# Altium PCB Buck_PCB.PcbDoc
Units mm, origin at the board's own origin, x right, y up, seen from the top; angles counter-clockwise.
Board outline 107.95 x 50.8 mm, 4 copper layers (Top Layer, MidLayer1, MidLayer2, Bottom Layer); 25 components, 16 nets, 65 pads, 71 vias.
Unrouted connection lines stored in the file: 3.
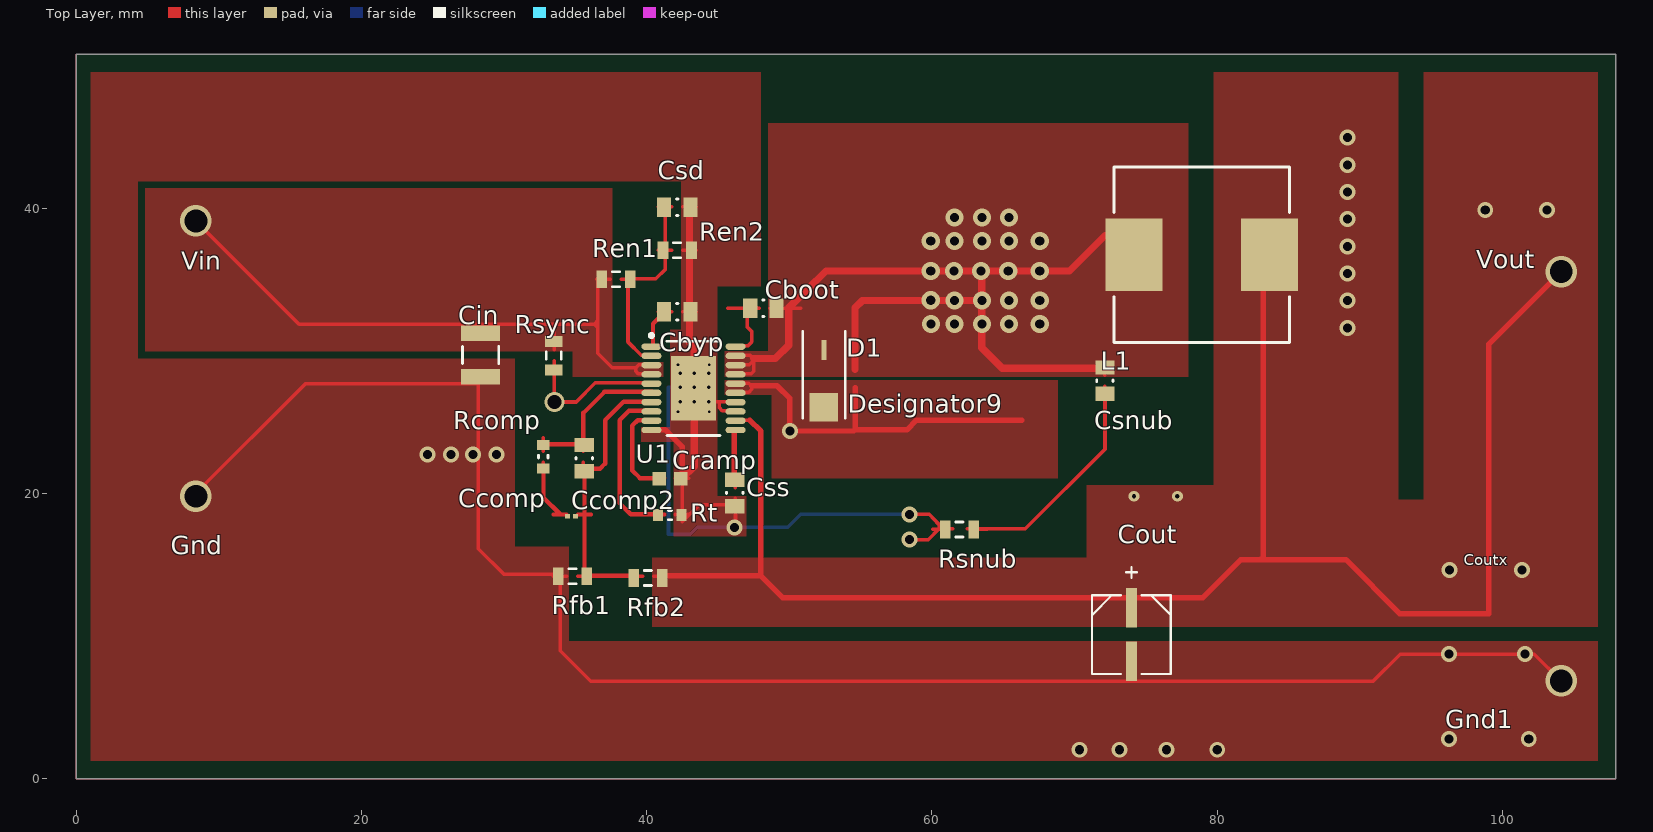
[diagram p0: Top Layer view]
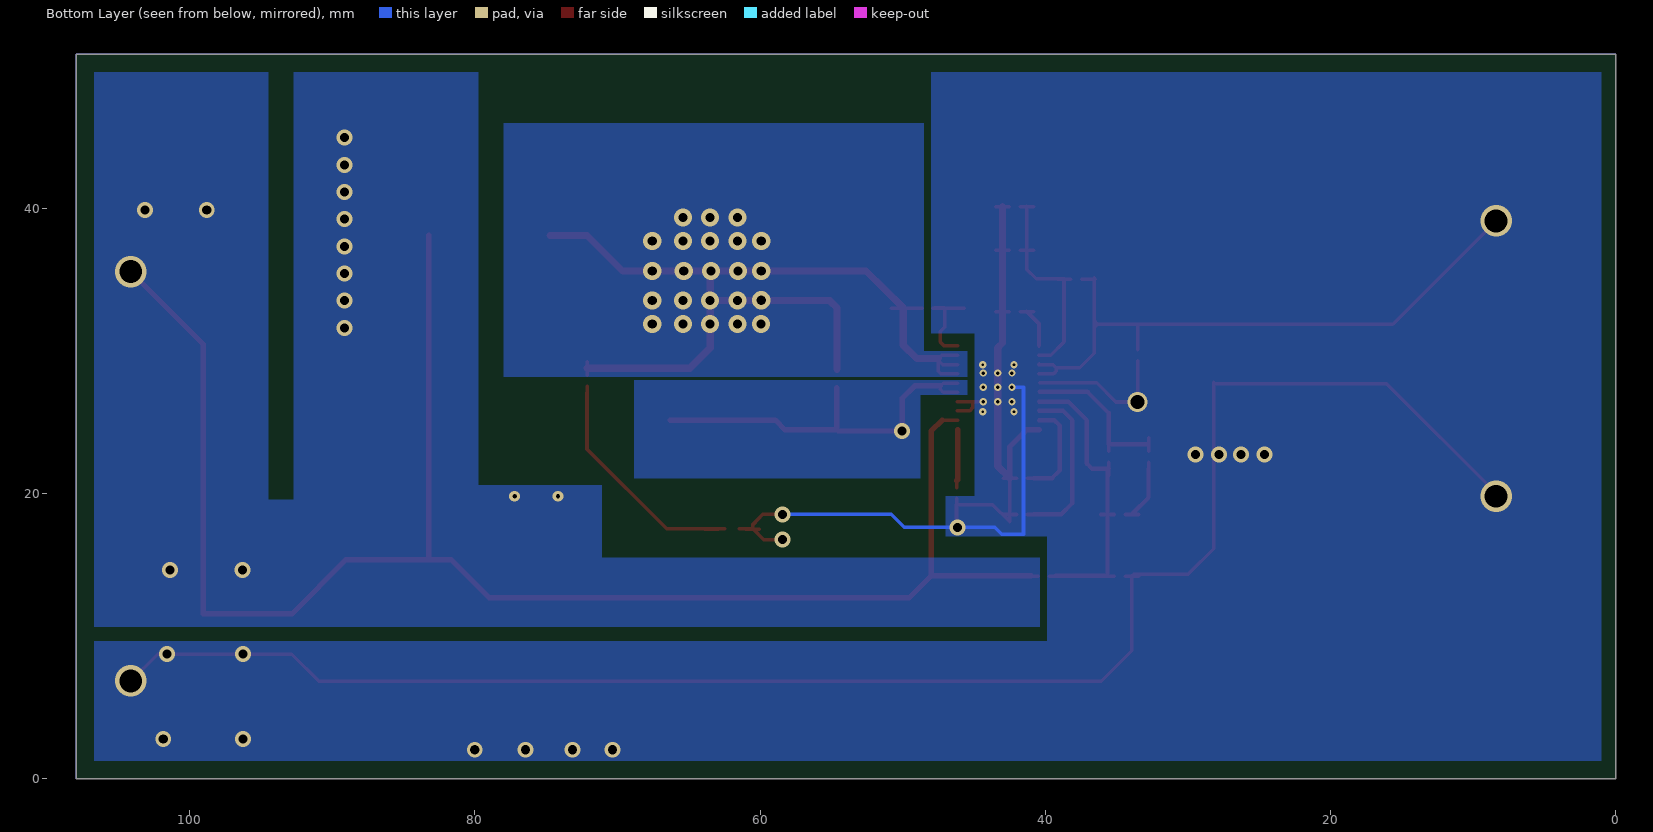
[diagram p1: Bottom Layer view, seen from below]
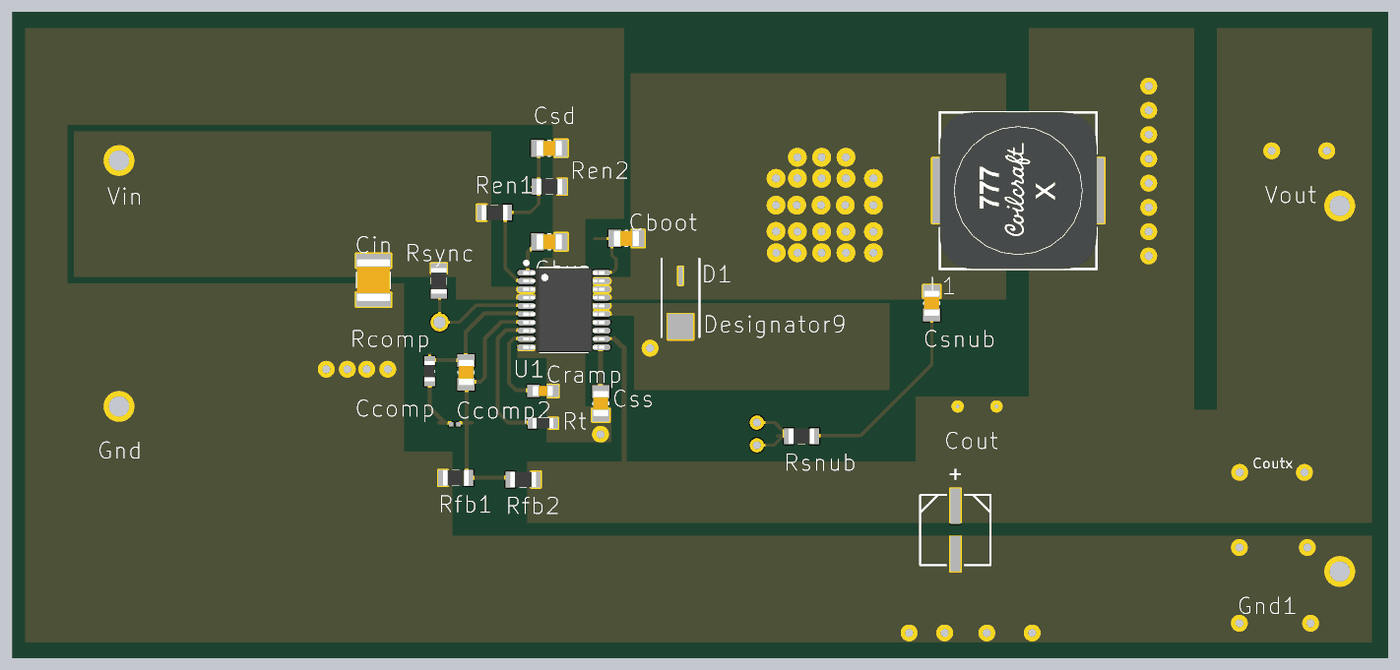
[diagram p2: 3D render of the assembled board from above, using the file's embedded part models]

## Layer stack, top to bottom
Top Solder: solder mask 0.0102, Solder Resist, Dk 3.5
Top Layer: signal copper 0.0356
Dielectric1: core 0.32, FR-4, Dk 4.8
MidLayer1: signal copper 0.0356
Dielectric2: prepreg 0.32, FR-4, Dk 4.8
MidLayer2: signal copper 0.0356
Dielectric3: core 0.32, FR-4, Dk 4.8
Bottom Layer: signal copper 0.0356
Bottom Solder: solder mask 0.0102, Solder Resist, Dk 3.5

## Board outline
0,0 107.95,0 107.95,50.8 0,50.8

## Design rules (kind name [scope] priority, off if disabled: settings)
Clearance [All] p1: gap=0.254 ignorepadtopadclearanceinfootprint=FALSE except(0: Arc-Hole Track-Hole SMDPad-Hole THPad-Hole Via-Hole Fill-Hole Poly-Hole Region-Hole Text-Hole)
PlaneConnect [All] p1: planeconnectstyle=Direct reliefexpansion=0.508 reliefentries=4 reliefconductorwidth=0.254 reliefairgap=0.254
PolygonConnect [All] p1: connectstyle=Direct reliefconductorwidth=0.254 reliefentries=4 polygonreliefangle="90 Angle" airgapwidth=0.254
RoutingVias [All] p1: holewidth=0.711 width=1.27 viastyle="Through Hole" minholewidth=0.711 minwidth=1.27 maxholewidth=0.711 maxwidth=1.27
SolderMaskExpansion [All] p1: expansion=0.102 istentingtop=FALSE
Width [All] p1: maxlimit=0.254 minlimit=0.254 preferedwidth=0.254
29 further rules are at their usual default settings.

## Components (designator, comment, footprint, x,y, rotation, side; value= is the part's Value field where it differs from the comment)
Cboot "Comment" "0805 - Capacitor" 48.184,32.995 r180 top
Cbyp "Comment" "0805 - Capacitor" 42.139,32.741 r0 top
Ccomp "Comment" 0201 34.722,18.415 r180 top
Ccomp2 "Comment" "0805 - Capacitor" 35.611,22.479 r90 top
Cin "Comment" "1210 - Capacitor" 28.346,29.718 r270 top
Cout "Comment" SM_RADIAL_5MM 73.99,10.109 r270 top
Cramp "Comment" "0603 - Capacitor" 41.631,21.031 r0 top
Csd "Comment" "0805 - Capacitor" 42.139,40.081 r0 top
Csnub "Comment" "0805 - Capacitor" 72.136,27.915 r270 top
Css "Comment" "0805 - Capacitor" 46.177,20.041 r270 top
D1 "Comment" SMA 52.426,28.067 r270 top
Gnd "Comment" TP-1502 8.331,19.787 r270 top
Gnd1 "Comment" TP-1502 104.115,6.833 r270 top
L1 "Comment" "MSS1210 - INDUCTOR" 78.918,36.754 r0 top
Rcomp "Comment" "0603 - Resistor" 32.741,22.581 r90 top
Ren1 "Comment" "0805 - Resistor" 37.846,35.027 r180 top
Ren2 "Comment" "0805 - Resistor" 42.139,37.059 r180 top
Rfb1 "Comment" "0805 - Resistor" 34.798,14.199 r180 top
Rfb2 "Comment" "0805 - Resistor" 40.081,14.072 r180 top
Rsnub "Comment" "0805 - Resistor" 61.925,17.475 r0 top
Rsync "Comment" "0805 - Resistor" 33.477,29.667 r90 top
Rt "Comment" "0603 - Resistor" 41.631,18.491 r0 top
U1 "Comment" LM5005 43.282,27.381 r0 top
Vin "Comment" TP-1502 8.331,39.091 r270 top
Vout "Comment" TP-1502 104.115,35.535 r270 top

## Footprints (in the part's own frame and the unit in brackets; to place one, negate y for a bottom-side part, rotate by r counter-clockwise, add the part's x,y. Pads: shape width x height; smd on the part's side, far side on the other; paste and mask are expansions set on the pad)
0201 [mil]
  rect 14x13 smd: 1(-11.5,0) 2(11.5,0)
"0603 - Capacitor" [mm] "0603 Chip Capacitor - IPC Medium Density"
  rect 0.95x0.95 smd: 1(-0.75,0) 2(0.75,0)
  body extent -0.8,-0.4 0.8,0.4, height 0.8
"0603 - Resistor" [mm] "0201 Chip Resistor - IPC Medium Density"
  rect 0.7x0.85 smd: 1(-0.825,0) 2(0.825,0)
  silkscreen extent -0.1,-0.33 0.1,0.33, body extent -0.8,-0.4 0.8,0.4, height 0.45
"0805 - Capacitor" [mm] "0805 Chip Capacitor - IPC Medium Density"
  rect 1x1.35 smd: 1(-0.925,0) 2(0.925,0)
  silkscreen extent -0.05,-0.58 0.05,0.58, body extent -1,-0.6 1,0.6, height 1.2
"0805 - Resistor" [mm] "0805 Chip Resistor - IPC Medium Density"
  rect 0.75x1.25 smd: 1(-1,0) 2(1,0)
  silkscreen extent -0.25,-0.53 0.25,0.53, body extent -1,-0.6 1,0.6, height 0.5
"1210 - Capacitor" [mm] "1210 Chip Capacitor - IPC Medium Density"
  rect 1.1x2.75 smd: 1(-1.525,0) 2(1.525,0)
  silkscreen extent -0.6,-1.27 0.6,1.28, body extent -1.65,-1.3 1.65,1.3, height 1.6
LM5005 [mm] "20-PowerTSSOP (0.173\"\", 4.40mm Width)"
  oval 1.4x0.45 smd: 1(-2.95,2.925) 2(-2.95,2.275) 3(-2.95,1.625) 4(-2.95,0.975) 5(-2.95,0.325) 6(-2.95,-0.325) 7(-2.95,-0.975) 8(-2.95,-1.625) 9(-2.95,-2.275) 10(-2.95,-2.925) 11(2.95,-2.925) 12(2.95,-2.275) 13(2.95,-1.625) 14(2.95,-0.975) 15(2.95,-0.325) 16(2.95,0.325) 17(2.95,0.975) 18(2.95,1.625) 19(2.95,2.275) 20(2.95,2.925)
  rect 3.15x4.5 smd: 21(0,0)
  silkscreen extent -3.07,-3.3 1.85,3.82, body extent -3.2,-3.3 3.2,3.3, height 1.1
"MSS1210 - INDUCTOR" [mm] "Precision Wire Wound Inductor, 2-Leads, Body 12.00x12.00mm, IPC Medium Density"
  rect 4x5.1 smd: 1(-4.75,0) 2(4.75,0)
  silkscreen extent -6.15,-6.15 6.15,6.15, body extent -6.15,-6.15 6.15,6.15, height 10.16
SM_RADIAL_5MM [mil]
  rect 109x31 smd: 1(-73.5,0) 2(73.5,0)
  silkscreen extent -187,-109 109,109
SMA [mm] "20-PowerTSSOP (0.173\"\", 4.40mm Width)"
  rect 1.422x0.356 smd: 1(-2,0)
  rect 2x2 smd: 2(2,0)
  silkscreen extent -3.33,-1.49 2.79,1.49
TP-1502 [mil]
  round 65 / inner round 0 / far side round 65 hole 32 unplated: 1(0,0)

## Via types
v1: diameter 1.118/1.118/1.118/1.118 (per signal layer), hole 0.635, Top Layer to Bottom Layer, 28 vias
v2: diameter 1.27/1.27/1.27/1.27 (per signal layer), hole 0.635, Top Layer to Bottom Layer, 23 vias
v3: diameter 0.508/0.508/0.508/0.508 (per signal layer), hole 0.254, Top Layer to Bottom Layer, 9 vias
v4: diameter 0.5, hole 0.2, Top Layer to Bottom Layer, 4 vias
v5: diameter 2.21/2.21/2.21/2.21 (per signal layer), hole 1.6, Top Layer to Bottom Layer, 4 vias
v6: diameter 0.762/0.762/0.762/0.762 (per signal layer), hole 0.305, Top Layer to Bottom Layer, 2 vias
v7: diameter 1.422/1.422/1.422/1.422 (per signal layer), hole 0.965, Top Layer to Bottom Layer, 1 vias

## Nets (pads, with @x,y where several pads share a name; then routed paths per layer and width w, separated by ;. In a path a pad name is that pad's centre, name@x,y a point inside that pad or via, vN(x,y) a via of type N, cw(c..) or ccw(c..) an arc to the next point about the centre after c; other vN are vias at no path point)
0: Cbyp.2 Cin.2 Cout.2 Cramp.2 Csd.2 Css.2 Gnd1.1 Gnd.1 Ren2.1 Rfb1.2 Rsnub.1 Rt.2 U1.10 U1.13 U1.14 U1.21 | length 197.8
  Top Layer w0.254: v5(8.382,19.812) 8.382,20.015 16.053,27.686 28.067,27.686 28.194,27.788 28.194,16.129 29.972,14.351 Rfb1.2@33.807,14.351 ; Rfb1.2@33.452,14.211 34.392,14.211 ; Rfb1.2@33.934,14.224 33.934,8.966 36.068,6.833 90.932,6.833 92.837,8.738 v1(96.266,8.738) 99.06,8.738 102.235,8.738 v5(104.14,6.858) ; 42.012,18.529 42.951,18.529 ; Cramp.2@42.012,21.069 42.951,21.069 ; Cramp.2@42.494,21.082 42.494,18.034 43.688,19.202 46.228,19.202 46.228,17.704 v1(46.152,17.628) ; 42.52,32.753 Cbyp.2@43.459,32.753 ; 42.52,37.071 Ren2.1@43.459,37.071 ; 42.52,40.119 Csd.2@43.459,40.119 ; v3(44.348,26.441) 45.085,26.441 ; U1.13@46.152,25.806 45.288,25.806 45.085,26.035 45.085,26.441 ; U1.14@46.152,26.441 45.085,26.441 ; Css.2@46.215,18.72 46.215,19.66 ; v1(58.42,16.764) 59.741,16.764 60.503,17.526 ; v1(58.42,18.542) 59.817,18.542 60.503,17.831 60.503,17.526 ; 60.046,17.501 Rsnub.1@60.985,17.501 ; 61.468,17.526 60.503,17.526
  Top Layer w0.381: U1.10@40.437,24.486 41.275,24.486 42.494,23.266 Cramp.2@42.494,21.082
  Top Layer w0.508: Cramp.2@42.494,21.082 43.332,21.92 v3(43.332,26.441) v3(43.332,27.457) v3(43.332,28.448) 43.332,30.226 43.002,30.556 43.002,32.766 43.002,37.084 Csd.2@43.002,40.132
  Bottom Layer w0.254: v3(42.342,27.457) 41.529,27.457 41.529,17.145 43.053,17.145 43.536,17.628 v1(46.152,17.628) 49.886,17.628 50.8,18.542 v1(58.42,18.542)
  other v1: 70.358,2.032 73.152,2.032 76.454,2.032 80.01,2.032 96.266,2.794 101.854,2.794 101.6,8.738 24.638,22.733 26.289,22.733 27.813,22.733 29.464,22.733
  other v3: 42.342,26.441 44.348,27.457 42.342,28.448 44.348,28.448
  other v4: 42.182,25.731 44.382,25.731 42.182,29.031 44.382,29.031
1: Ccomp2.2 Rcomp.2 U1.6 | length 12.3
  Top Layer w0.254: 32.753,22.962 32.753,23.901 ; Ccomp2.2@35.547,22.962 Ccomp2.2@35.547,23.901
  Top Layer w0.305: Rcomp.2@32.766,23.444 35.56,23.444 35.56,25.654 37.033,27.127 U1.6@40.386,27.127
2: Ccomp2.1 Ccomp.1 Rfb1.1 Rfb2.2 U1.7 | length 23.6
  Top Layer w0.254: 35.154,14.211 Rfb1.1@36.093,14.211 ; Ccomp.1@35.154,18.529 36.093,18.529 ; Ccomp2.1@35.547,21.26 35.547,22.2 ; Rfb2.2@38.786,14.211 39.726,14.211
  Top Layer w0.305: Rfb2.2@39.268,14.224 35.636,14.224 35.636,18.542 35.636,21.666 35.56,21.742 36.728,21.742 37.084,22.098 37.084,25.146 38.379,26.441 U1.7@40.437,26.441
3: Css.1 U1.11 | length 4.6
  Top Layer w0.254: 46.215,20.422 Css.1@46.215,21.361
  Top Layer w0.381: U1.11@46.152,24.486 46.152,20.98 Css.1@46.228,20.904
4: Cboot.1 Csnub.1 U1.20 | length 6.8
  Top Layer w0.254: 45.695,32.995 47.879,32.995 ; U1.20@46.152,30.353 47.092,30.353 47.371,30.632 47.371,31.369 47.041,31.674 47.041,33.02 47.752,33.02
5: D1.2 U1.15 U1.16 | length 27.7
  Top Layer w0.254: U1.15@46.152,27.102 47.168,27.102 47.371,27.305 47.371,27.559 47.168,27.737 U1.16@46.152,27.737
  Top Layer w0.381: 47.371,27.559 49.124,27.559 50.038,26.67 v1(50.038,24.384) 54.508,24.384 54.61,24.46 ; 54.61,27.432 54.61,24.46 ; 66.294,25.146 61.214,25.146 58.928,25.146 58.242,24.46 54.61,24.46
6: Cout.1 L1.2 Rfb2.1 U1.12 Vout.1 | length 123.6
  Top Layer w0.254: 40.488,14.211 40.97,14.211 Rfb2.1@41.427,14.211 ; U1.12@46.152,25.146 47.219,25.146
  Top Layer w0.381: Rfb2.1@40.97,14.224 41.427,14.224 48.006,14.224 ; 47.219,25.146 48.006,24.384 48.006,14.224 ; L1.2@83.236,38.1 83.236,15.545 83.058,15.367 ; v5(104.14,35.56) 99.06,30.48 99.06,11.557 92.812,11.557 89.027,15.367 83.236,15.367 83.058,15.367 ; 48.006,14.224 49.53,12.7 73.99,12.7 78.994,12.7 81.661,15.367 83.058,15.367
  other v1: 96.291,14.63 101.371,14.63 89.154,31.623 89.154,33.528 89.154,35.433 89.154,37.338 89.154,39.243 98.806,39.878 103.124,39.878 89.154,41.148 89.154,43.053 89.154,44.958
  other v6: 74.168,19.812 77.216,19.812
7: Cin.1 Ren1.2 Rsync.2 U1.3 U1.4 Vin.1 | length 46.4
  Top Layer w0.254: v5(8.382,39.116) 15.621,31.877 28.169,31.877 28.194,31.877 33.528,31.877 ; 33.515,30.074 Rsync.2@33.515,31.013 ; Rsync.2@33.528,30.556 33.528,31.877 ; Ren1.2@36.5,35.039 37.44,35.039 ; Ren1.2@36.576,35.128 36.576,32.131 ; U1.3@40.411,29.083 U1.3@40.437,29.032 ; U1.4@40.437,28.397 39.395,28.397 39.243,28.575 39.243,28.829 ; U1.3@40.462,29.032 U1.3@40.437,29.032 ; 33.528,31.877 36.322,31.877 ; 36.322,31.877 36.576,31.623 ; 36.322,31.877 36.576,31.877 ; 36.322,31.877 36.576,32.131 ; 36.576,31.623 36.576,29.845 37.592,28.829 39.243,28.829 ; 36.576,31.623 36.576,31.877 ; 36.576,31.877 36.576,32.131 ; 39.243,28.829 39.446,29.032 U1.3@40.437,29.032
8: Cbyp.1 U1.1 | length 3.7
  Top Layer w0.254: Cbyp.1@40.818,32.753 41.758,32.753
  Top Layer w0.305: U1.1@40.437,30.353 40.437,31.902 Cbyp.1@41.3,32.766
9: Cramp.1 U1.9 | length 7.7
  Top Layer w0.254: 40.31,21.069 Cramp.1@41.25,21.069
  Top Layer w0.305: U1.9@40.437,25.146 39.37,25.146 38.989,24.765 38.989,21.615 39.522,21.082 Cramp.1@40.792,21.082
10: Cboot.2 D1.1 L1.1 U1.17 U1.18 U1.19 | length 68.7
  Top Layer w0.254: U1.17@46.152,28.397 47.32,28.397 47.498,28.575 47.498,29.337 ; U1.18@46.152,29.032 47.193,29.032 47.498,29.337 ; U1.19@46.152,29.693 47.244,29.693 47.498,29.464 47.498,29.337 ; 48.616,32.995 49.962,32.995 50.8,32.995 ; 72.123,28.296 72.123,28.778 72.123,29.235
  Top Layer w0.508: 47.498,29.464 49.022,29.464 49.962,30.404 49.962,33.02 52.578,35.611 v2(59.919,35.611) v2(61.544,35.611) v2(63.449,35.611) ; 54.61,28.702 54.61,31.394 54.61,33.02 55.118,33.528 59.919,33.528 v2(61.595,33.528) v2(63.5,33.528) ; 72.136,28.778 64.922,28.778 63.5,30.226 v2(63.5,31.877) v2(63.5,33.528) ; L1.1@74.727,38.1 72.136,38.1 69.647,35.611 v2(67.564,35.611) v2(65.354,35.611) v2(63.449,35.611) ; v2(63.449,35.611) 63.5,35.585 v2(63.5,33.528)
  other v2: 59.944,31.877 61.595,31.877 65.405,31.877 67.564,31.877 65.405,33.528 67.564,33.528 59.919,33.553 59.919,37.719 61.595,37.719 63.5,37.719 65.405,37.719 67.564,37.719 61.595,39.37 63.5,39.37 65.405,39.37
11: Ccomp.2 Rcomp.1 | length 5.6
  Top Layer w0.254: 32.753,21.26 32.753,22.2 ; 33.452,18.529 Ccomp.2@34.392,18.529
  Top Layer w0.305: Rcomp.1@32.766,21.742 32.766,19.71 33.934,18.542
12: Rt.1 U1.8 | length 12.4
  Top Layer w0.254: 40.31,18.529 41.25,18.529
  Top Layer w0.305: U1.8@40.437,25.806 38.76,25.806 38.1,25.146 38.1,19.329 38.887,18.542 Rt.1@40.792,18.542
13: Csnub.2 Rsnub.2 | length 17.8
  Top Layer w0.254: 62.484,17.526 63.424,17.526 66.548,17.526 72.136,23.114 Csnub.2@72.136,27.076 ; Rsnub.2@62.941,17.501 63.881,17.501 ; Csnub.2@72.123,26.594 72.123,27.534
24: Rsync.1 U1.5 | length 10.8
  Top Layer w0.254: Rsync.1@33.515,28.372 33.515,29.312 ; Rsync.1@33.528,28.854 v7(33.528,26.416) 35.052,26.416 36.398,27.762 U1.5@40.386,27.762
26: Csd.1 Ren1.1 Ren2.2 U1.2 | length 16.7
  Top Layer w0.254: 38.202,35.039 Ren1.1@39.141,35.039 ; U1.2@40.437,29.693 39.624,29.693 38.684,30.632 38.684,35.052 40.64,35.052 41.3,35.712 41.3,37.084 Csd.1@41.3,40.132 ; Ren2.2@40.818,37.071 41.758,37.071 ; Csd.1@40.818,40.119 41.758,40.119

## Polygon pours and split planes (outlines as drawn)
10 on Top Layer "Top Layer-No Net" (solid, pour order 3): 45.466,29.972 48.514,29.972 48.514,45.974 77.978,45.974 77.978,28.194 45.466,28.194
6 on Top Layer "Top Layer-No Net" (solid, pour order 0): 40.386,10.668 40.386,15.494 70.866,15.494 70.866,20.574 79.756,20.574 79.756,49.53 92.71,49.53 92.71,19.558 94.488,19.558 94.488,49.53 106.68,49.53 106.68,10.668
7 on Top Layer "Top Layer-No Net" (solid, pour order 1): 4.826,29.972 4.826,41.402 37.592,41.402 37.592,29.21 41.148,29.21 41.148,28.194 34.798,28.194 34.798,29.972
5 on Top Layer "Top Layer-No Net" (solid, pour order 2): 45.466,27.94 68.834,27.94 68.834,21.082 48.768,21.082 48.768,26.924 45.466,26.924
0 on Top Layer "Top Layer-No Net" (solid, pour order 7): 30.734,29.464 30.734,16.256 34.544,16.256 34.544,9.652 106.68,9.652 106.68,1.27 1.016,1.27 1.016,49.53 48.006,49.53 48.006,34.544 44.958,34.544 44.958,19.812 46.99,19.812 46.99,17.018 41.91,17.018 41.91,23.622 39.624,23.622 39.624,24.638 41.656,24.638 41.656,31.496 42.418,31.496 42.418,41.91 4.318,41.91 4.318,29.464
6 on Bottom Layer "Top Layer-No Net" (solid, pour order 4): 40.386,10.668 40.386,15.494 71.12,15.494 71.12,20.574 79.756,20.574 79.756,49.53 92.71,49.53 92.71,19.558 94.488,19.558 94.488,49.53 106.68,49.53 106.68,10.668
5 on Bottom Layer "Top Layer-No Net" (solid, pour order 5): 45.466,27.94 68.834,27.94 68.834,21.082 48.768,21.082 48.768,26.924 45.466,26.924
10 on Bottom Layer "Top Layer-No Net" (solid, pour order 6): 45.466,29.972 48.514,29.972 48.514,45.974 77.978,45.974 77.978,28.194 45.466,28.194
0 on Bottom Layer "Top Layer-No Net" (solid, pour order 8): 48.006,49.53 48.006,31.242 44.958,31.242 44.958,19.812 46.99,19.812 46.99,17.018 39.878,17.018 39.878,9.652 106.68,9.652 106.68,1.27 1.016,1.27 1.016,49.53
no net on Top Overlay "Top Layer-No Net" (solid, remove dead copper): 50.851,31.725 50.851,31.217 54,31.217 54,31.725

## Other copper
Multi-Layer:
  the board outline again, w0.025

## Silkscreen, mask and mechanical layers (free items; w line width, h text height)
Top Overlay:
  text "Coutx" at 97.282,14.986 h0.76

## Text inside footprints (layer, text, board x,y; h text height)
D1: Top Overlay "Designator9" at 54.102,25.654 h1.27